# EAGLE board terminal board 2.0 (EAGLE 7.3.0)
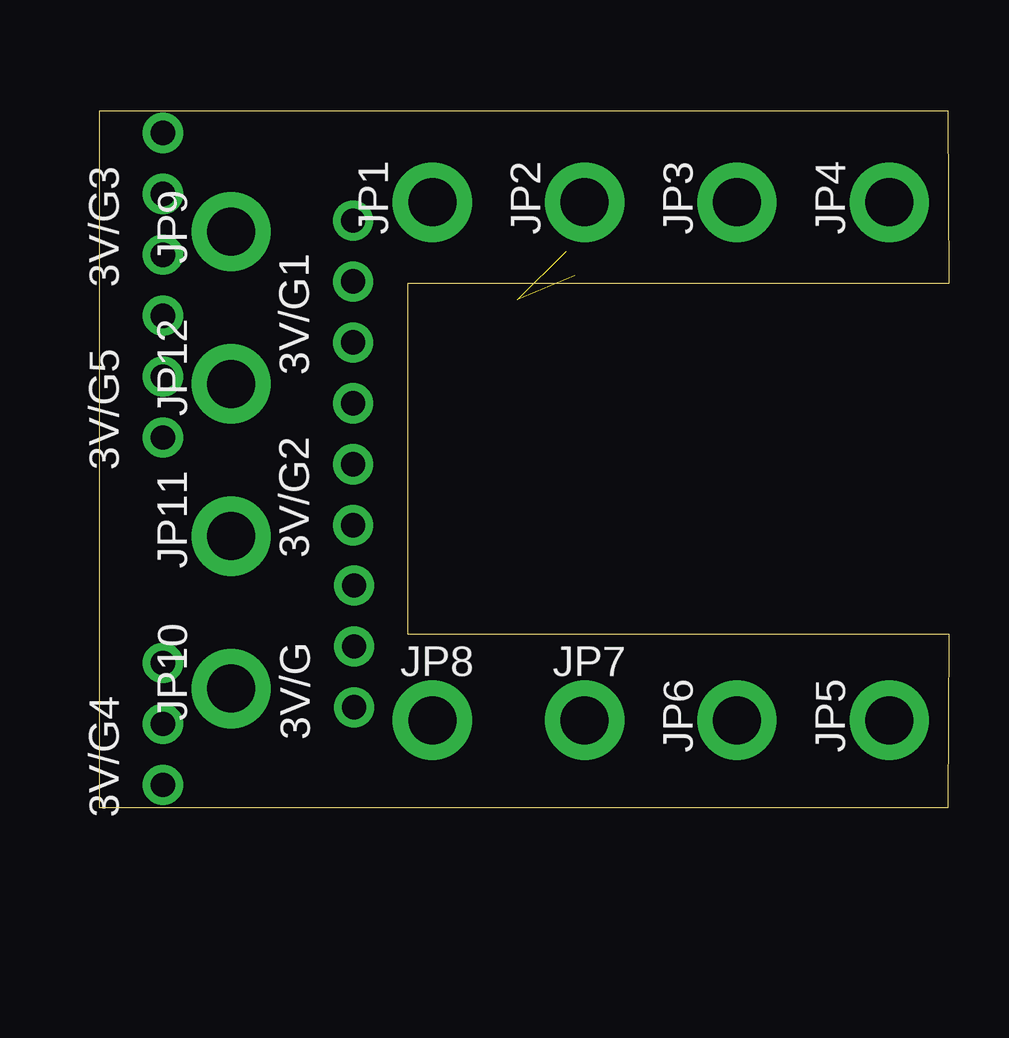
[diagram p0: board, top side]
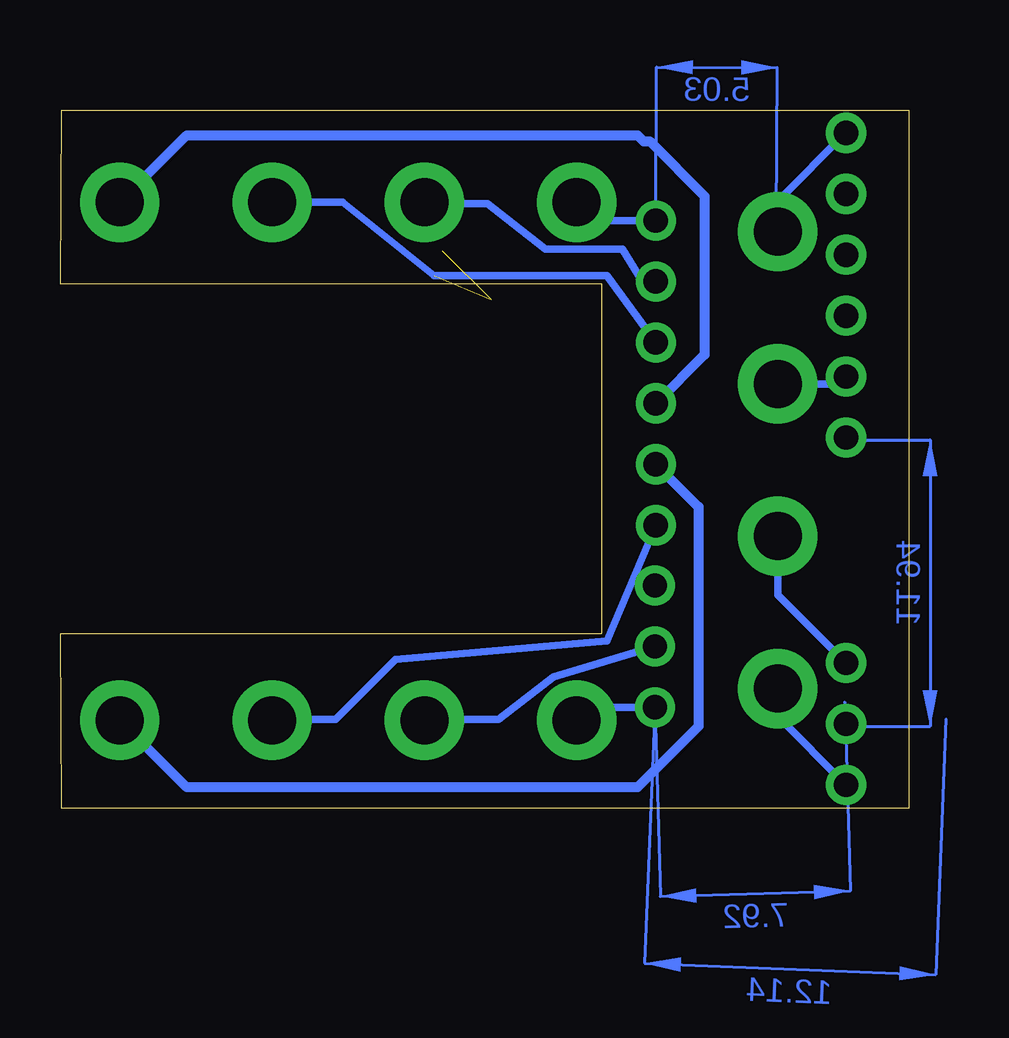
[diagram p1: board, bottom side, seen from below]

Size 35.41 x 29.06 mm. Coordinates in mm from the lower left corner, seen from the top.
Outline: 0,29.06 35.36,29.06 35.41,21.87 12.83,21.87 12.83,7.26 35.41,7.26 35.36,0 0,0 0,29.06
Copper layers (1*16): Top 0.035mm / dielectric 1.5mm / Bottom 0.035mm
Design rules "Othermill-DRC-1-64": minimum track width 8mil, minimum drill 0.8mm, track to track 0.39878125mm, track to pad 0.39878125mm, pad to pad 0.39878125mm, via to via 0.39878125mm, smd to smd 0mil, copper to edge 0mil, drill to drill 1mil, minimum pad ring 10mil, minimum via ring 10mil, stop-mask expansion 1mil, vias tented up to drill 30mil, thermal gap 10mil

## Footprints (pad centres in the part's own frame; a part is rotated, then mirrored left to right if it is on the bottom)
1X03-CLEANBIG = drill 1.016 pad 1.676: 1 -2.54,0; 2 0,0; 3 2.54,0
1X01_2MM = drill 2 pad 3.302: 1 0,0
STAND-OFF-TIGHT = hole 3.048: 0,0

## Placement (x,y rotation side)
3V/G  [1X03-CLEANBIG]  10.61,6.74 90 top
3V/G1  [1X03-CLEANBIG]  10.57,21.95 90 top
3V/G2  [1X03-CLEANBIG]  10.57,14.33 90 top
3V/G3  [1X03-CLEANBIG]  2.64,25.6 90 top
3V/G4  [1X03-CLEANBIG]  2.64,3.51 90 top
3V/G5  [1X03-CLEANBIG]  2.64,17.98 90 top
JP1  [1X01_2MM]  13.87,25.25 90 top
JP2  [1X01_2MM]  20.22,25.25 90 top
JP3  [1X01_2MM]  26.57,25.25 90 top
JP4  [1X01_2MM]  32.92,25.25 90 top
JP5  [1X01_2MM]  32.92,3.66 90 top
JP6  [1X01_2MM]  26.57,3.66 90 top
JP7  [1X01_2MM]  20.22,3.66 0 top
JP8  [1X01_2MM]  13.87,3.66 0 top
JP9  [1X01_2MM]  5.49,24.03 90 top
JP10  [1X01_2MM]  5.49,4.98 90 top
JP11  [1X01_2MM]  5.49,11.33 90 top
JP12  [1X01_2MM]  5.49,17.68 90 top
U$1  [STAND-OFF-TIGHT]  42.07,13.95 0 top  (outside the outline)

## Library data of the parts
3V/G 3V/G1-3V/G5 = adafruit
JP1-JP12 = SparkFun-Connectors
U$1 = SparkFun-Electromechanical

## Nets
N$1: 3V/G2.2 JP5.1
N$2: 3V/G2.1 JP6.1
N$3: 3V/G.2 JP7.1
N$4: 3V/G.1 JP8.1
N$5: 3V/G1.3 JP1.1
N$6: 3V/G1.2 JP2.1
N$7: 3V/G1.1 JP3.1
N$8: 3V/G2.3 JP4.1
N$9: 3V/G4.1 JP10.1
N$10: 3V/G4.3 JP11.1
N$11: 3V/G5.2 JP12.1
N$12: 3V/G3.3 JP9.1

## Tracks (layer width: path | path; a pad name or v marks a point on that pad's centre or on a via)
N$1
  Bottom 0.406: 3V/G2.2 8.79,12.55 8.79,3.4 11.33,0.86 30.12,0.86 JP5.1
N$2
  Bottom 0.305: 3V/G2.1 12.6,6.96 21.41,6.2 23.93,3.68 26.54,3.68 JP6.1
N$3
  Bottom 0.305: JP7.1 20.19,3.68 17.12,3.68 14.83,5.47 3V/G.2
N$4
  Bottom 0.305: 3V/G.1 13.33,4.2 JP8.1
N$5
  Bottom 0.305: 3V/G1.3 13.11,24.49 JP1.1
N$6
  Bottom 0.305: 3V/G1.2 11.13,21.95 11.96,23.29 15.16,23.29 17.58,25.2 20.17,25.2 JP2.1
N$7  (2 unrouted)
  Bottom 0.305: 3V/G1.1 12.6,22.2 19.81,22.2 23.62,25.25 JP3.1
N$8
  Bottom 0.406: JP4.1 30.12,28.04 11.33,28.04 11.07,27.79 10.82,27.79 8.53,25.5 8.53,18.9 3V/G2.3
N$9
  Bottom 0.305: JP10.1 5.49,3.81 3V/G4.1
N$10
  Bottom 0.305: JP11.1 5.49,8.89 3V/G4.3
N$11
  Bottom 0.305: JP12.1 2.95,17.68 3V/G5.2
N$12
  Bottom 0.305: JP9.1 5.49,25.3 3V/G3.3
(copper drawn outside any net)
  shapes: Bottom area x4